# Altium PCB 起跑突击V4.1.PcbDoc
Units mil, origin at the board's own origin, x right, y up, seen from the top; angles counter-clockwise.
Board outline 6000 x 4000 mil, 2 copper layers (Top Layer, Bottom Layer); 12 components, 7 nets, 35 pads, 0 vias.
Unrouted connection lines stored in the file: 26.
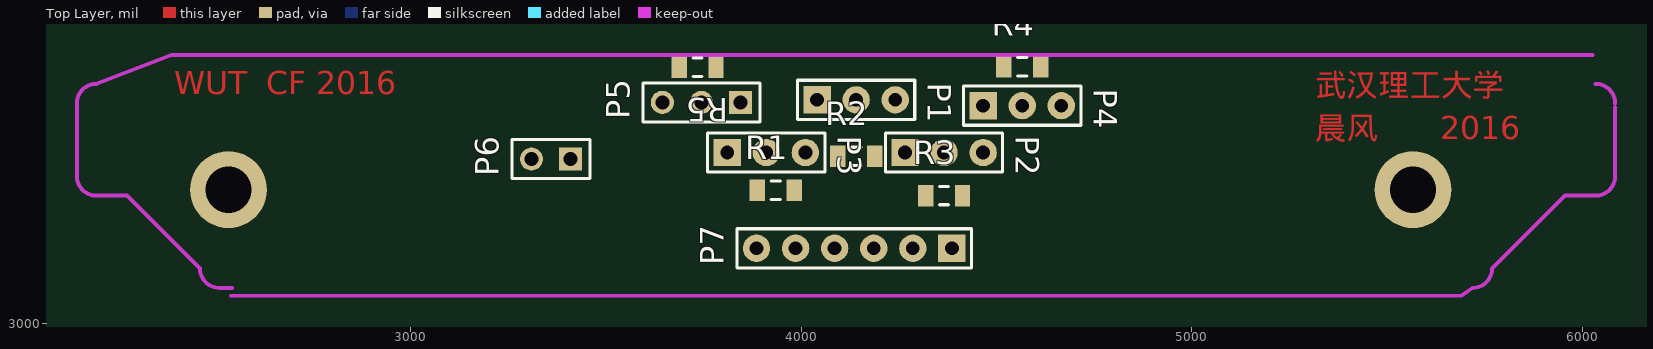
[diagram p0: Top Layer view]
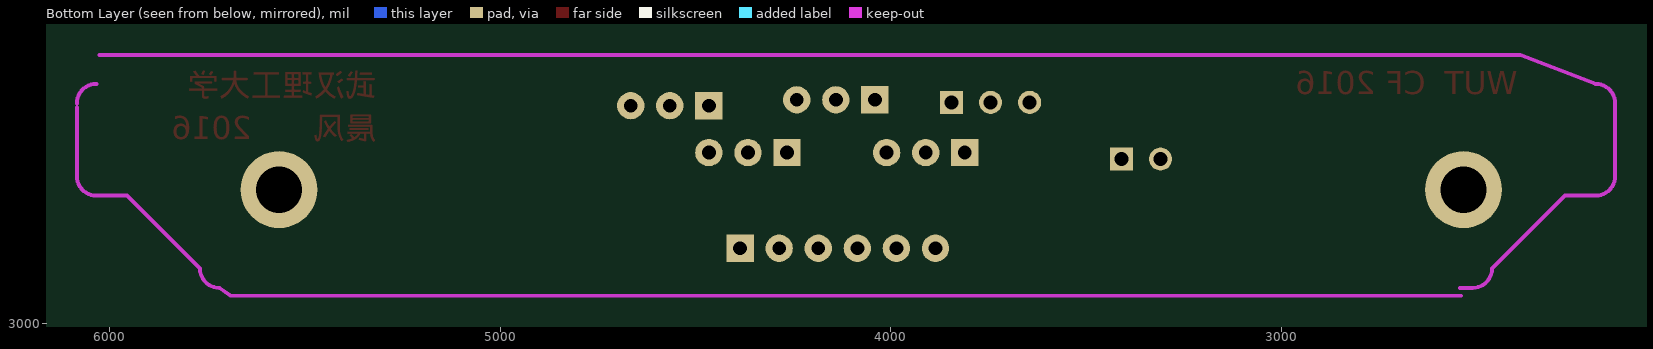
[diagram p1: Bottom Layer view, seen from below]

## Layer stack, top to bottom
Top Layer: signal copper 1.4
Dielectric: dielectric 12.6, FR-4, Dk 4.8
Bottom Layer: signal copper 1.4

## Board outline
1000,1000 7000,1000 7000,5000 1000,5000

## Design rules (kind name [scope] priority, off if disabled: settings)
Clearance [All] p1: gap=10
PolygonConnect [All] p1: connectstyle=Relief reliefconductorwidth=10 reliefentries=4 polygonreliefangle="90 Angle" airgapwidth=10
RoutingVias [All] p1: holewidth=28 width=50 viastyle="Through Hole" minholewidth=28 minwidth=50 maxholewidth=28 maxwidth=50
SolderMaskExpansion [All] p1: expansion=4
Width [All] p1: maxlimit=10 minlimit=10 preferedwidth=10
28 further rules are at their usual default settings.

## Classes and differential pairs
component class 起跑突击V4.0: P1 P2 P3 P4 P6 P7 R1 R2 R3 R4 R5

## Components (designator, comment, footprint, x,y, rotation, side; value= is the part's Value field where it differs from the comment)
P1 "Header 3" HDR1X3#1 4041,3571.59 r0 top
P2 "Header 3" HDR1X3#1 4266,3436.59 r0 top
P3 "Header 3" HDR1X3#1 3811,3436.59 r0 top
P4 "Header 3" HDR1X3#1 4466,3556.59 r0 top
P5 "Header 3" HDR1X3#2 3845,3565 r180 top
P6 "Header 2" HDR1X2 3410,3420 r180 top
P7 "Header 6" HDR1X6 4386,3191.59 r180 top
R1 "Res" R2012 3935,3340 r0 top
R2 "Res" R2012 4141,3426.59 r0 top
R3 "Res" R2012 4366,3326.59 r0 top
R4 "Res" R2012 4566,3656.59 r0 top
R5 "Res" R2012 3735,3655 r180 top

## Footprints (in the part's own frame and the unit in brackets; to place one, negate y for a bottom-side part, rotate by r counter-clockwise, add the part's x,y. Pads: shape width x height; smd on the part's side, far side on the other; paste and mask are expansions set on the pad)
HDR1X2 [mm] "Connector; Header; 2 Position"
  rect 1.5x1.5 hole 0.9: 1(0,0)
  round 1.5 hole 0.9: 2(2.54,0)
  silkscreen extent -1.27,-1.27 3.81,1.27, body extent -1.27,-1.27 3.81,1.27, height 7.58
HDR1X3#1 [mil] "Connector; Header; 3 Position"
  rect 70x70 hole 35.43: 1(0,0)
  round 70 hole 35.43: 2(100,0) 3(200,0)
  silkscreen extent -50,-50 250,50, body extent -50,-50 250,50, height 298
HDR1X3#2 [mil] "Connector; Header; 3 Position"
  rect 59.06x59.06 hole 35.43: 1(0,0)
  round 59.06 hole 35.43: 2(100,0) 3(200,0)
  silkscreen extent -50,-50 250,50, body extent -50,-50 250,50, height 298
HDR1X6 [mil] "Connector; Header; 6 Position"
  rect 70x70 hole 35.43: 1(0,0)
  round 70 hole 35.43: 2(100,0) 3(200,0) 4(300,0) 5(400,0) 6(500,0)
  silkscreen extent -50,-50 550,50, body extent -50,-50 550,50, height 298
R2012 [mm] "Chip Resistor, 2-Leads, Body 2.0x1.2mm, IPC Low Density"
  rect 1x1.4 smd: 1(-1.2,0) 2(1.2,0)
  silkscreen extent -0.3,-0.6 0.3,0.6, body extent -0.98,-0.6 1.02,0.6, height 0.5

## Part data
P1 P2 P3 P4 P5: "Header, 3-Pin"
P6: "Header, 2-Pin"
P7: "Header, 6-Pin"
R1 R2 R3 R4 R5: "贴片电阻"

## Free pads (board coordinates)
  round 196.85 hole 118.11: 0(5566,3341.59) 1(2534.5,3341.59)

## Nets (pads, with @x,y where several pads share a name; then routed paths per layer and width w, separated by ;. In a path a pad name is that pad's centre, name@x,y a point inside that pad or via, vN(x,y) a via of type N, cw(c..) or ccw(c..) an arc to the next point about the centre after c; other vN are vias at no path point)
GND: P1.2 P2.2 P3.2 P4.2 P5.2 P7.3
IO1: P3.3 P7.6 R1.2
IO2: P1.3 P7.5 R2.2
IO3: P2.3 P7.4 R3.2
IO4: P4.3 P7.2 R4.2
IO5: P5.3 P7.1 R5.2
VCC: P1.1 P2.1 P3.1 P4.1 P5.1 P6.1 P6.2 R1.1 R2.1 R3.1 R4.1 R5.1

## Keep-outs
Keep-Out Layer:
  lines w10: 2540.2,3070 5689.8,3070 5718.54,3090 ccw(c5718.54,3140) 5768.54,3140 5954.76,3326.22 6033.5,3326.22 ccw(c6033.5,3376.22) 6083.5,3376.22 6083.5,3415.59 6083.5,3552.59 ; 2544,3090 2511.46,3090 cw(c2511.46,3140) 2461.46,3140 2275.24,3326.22 2196.5,3326.22 cw(c2196.5,3376.22) 2146.5,3376.22 2146.5,3562.56 cw(c2196.5,3562.56) 2196.5,3612.56 2389.68,3686.59 6026,3686.59 ; 6033.5,3612.56 cw(c6033.5,3562.56) 6083.5,3562.56
  text "作废" at 3340,2515 h1000 r45

## Other copper
Top Layer:
  text "WUT" at 2396,3566.59 h100
  text "CF 2016" at 2631,3566.59 h100
  text "武汉理工大学" at 5316,3561.59 h100
  text "晨风" at 5316,3451.59 h100
  text "2016" at 5636,3451.59 h100

## Silkscreen, mask and mechanical layers (free items; w line width, h text height)
Mechanical 15:
  lines w10: 2343.35,2980 5886.65,2980 ; 3642.56,2845 4587.44,2845